# Altium PCB PCB_REV1.PcbDoc (part 2 of 2)
Units mm, origin at the board's own origin, x right, y up, seen from the top; angles counter-clockwise.
Board outline 243.25 x 252.25 mm, 2 copper layers (Top Layer, Bottom Layer); 216 components, 186 nets, 603 pads, 64 vias.
Unrouted connection lines stored in the file: 121.
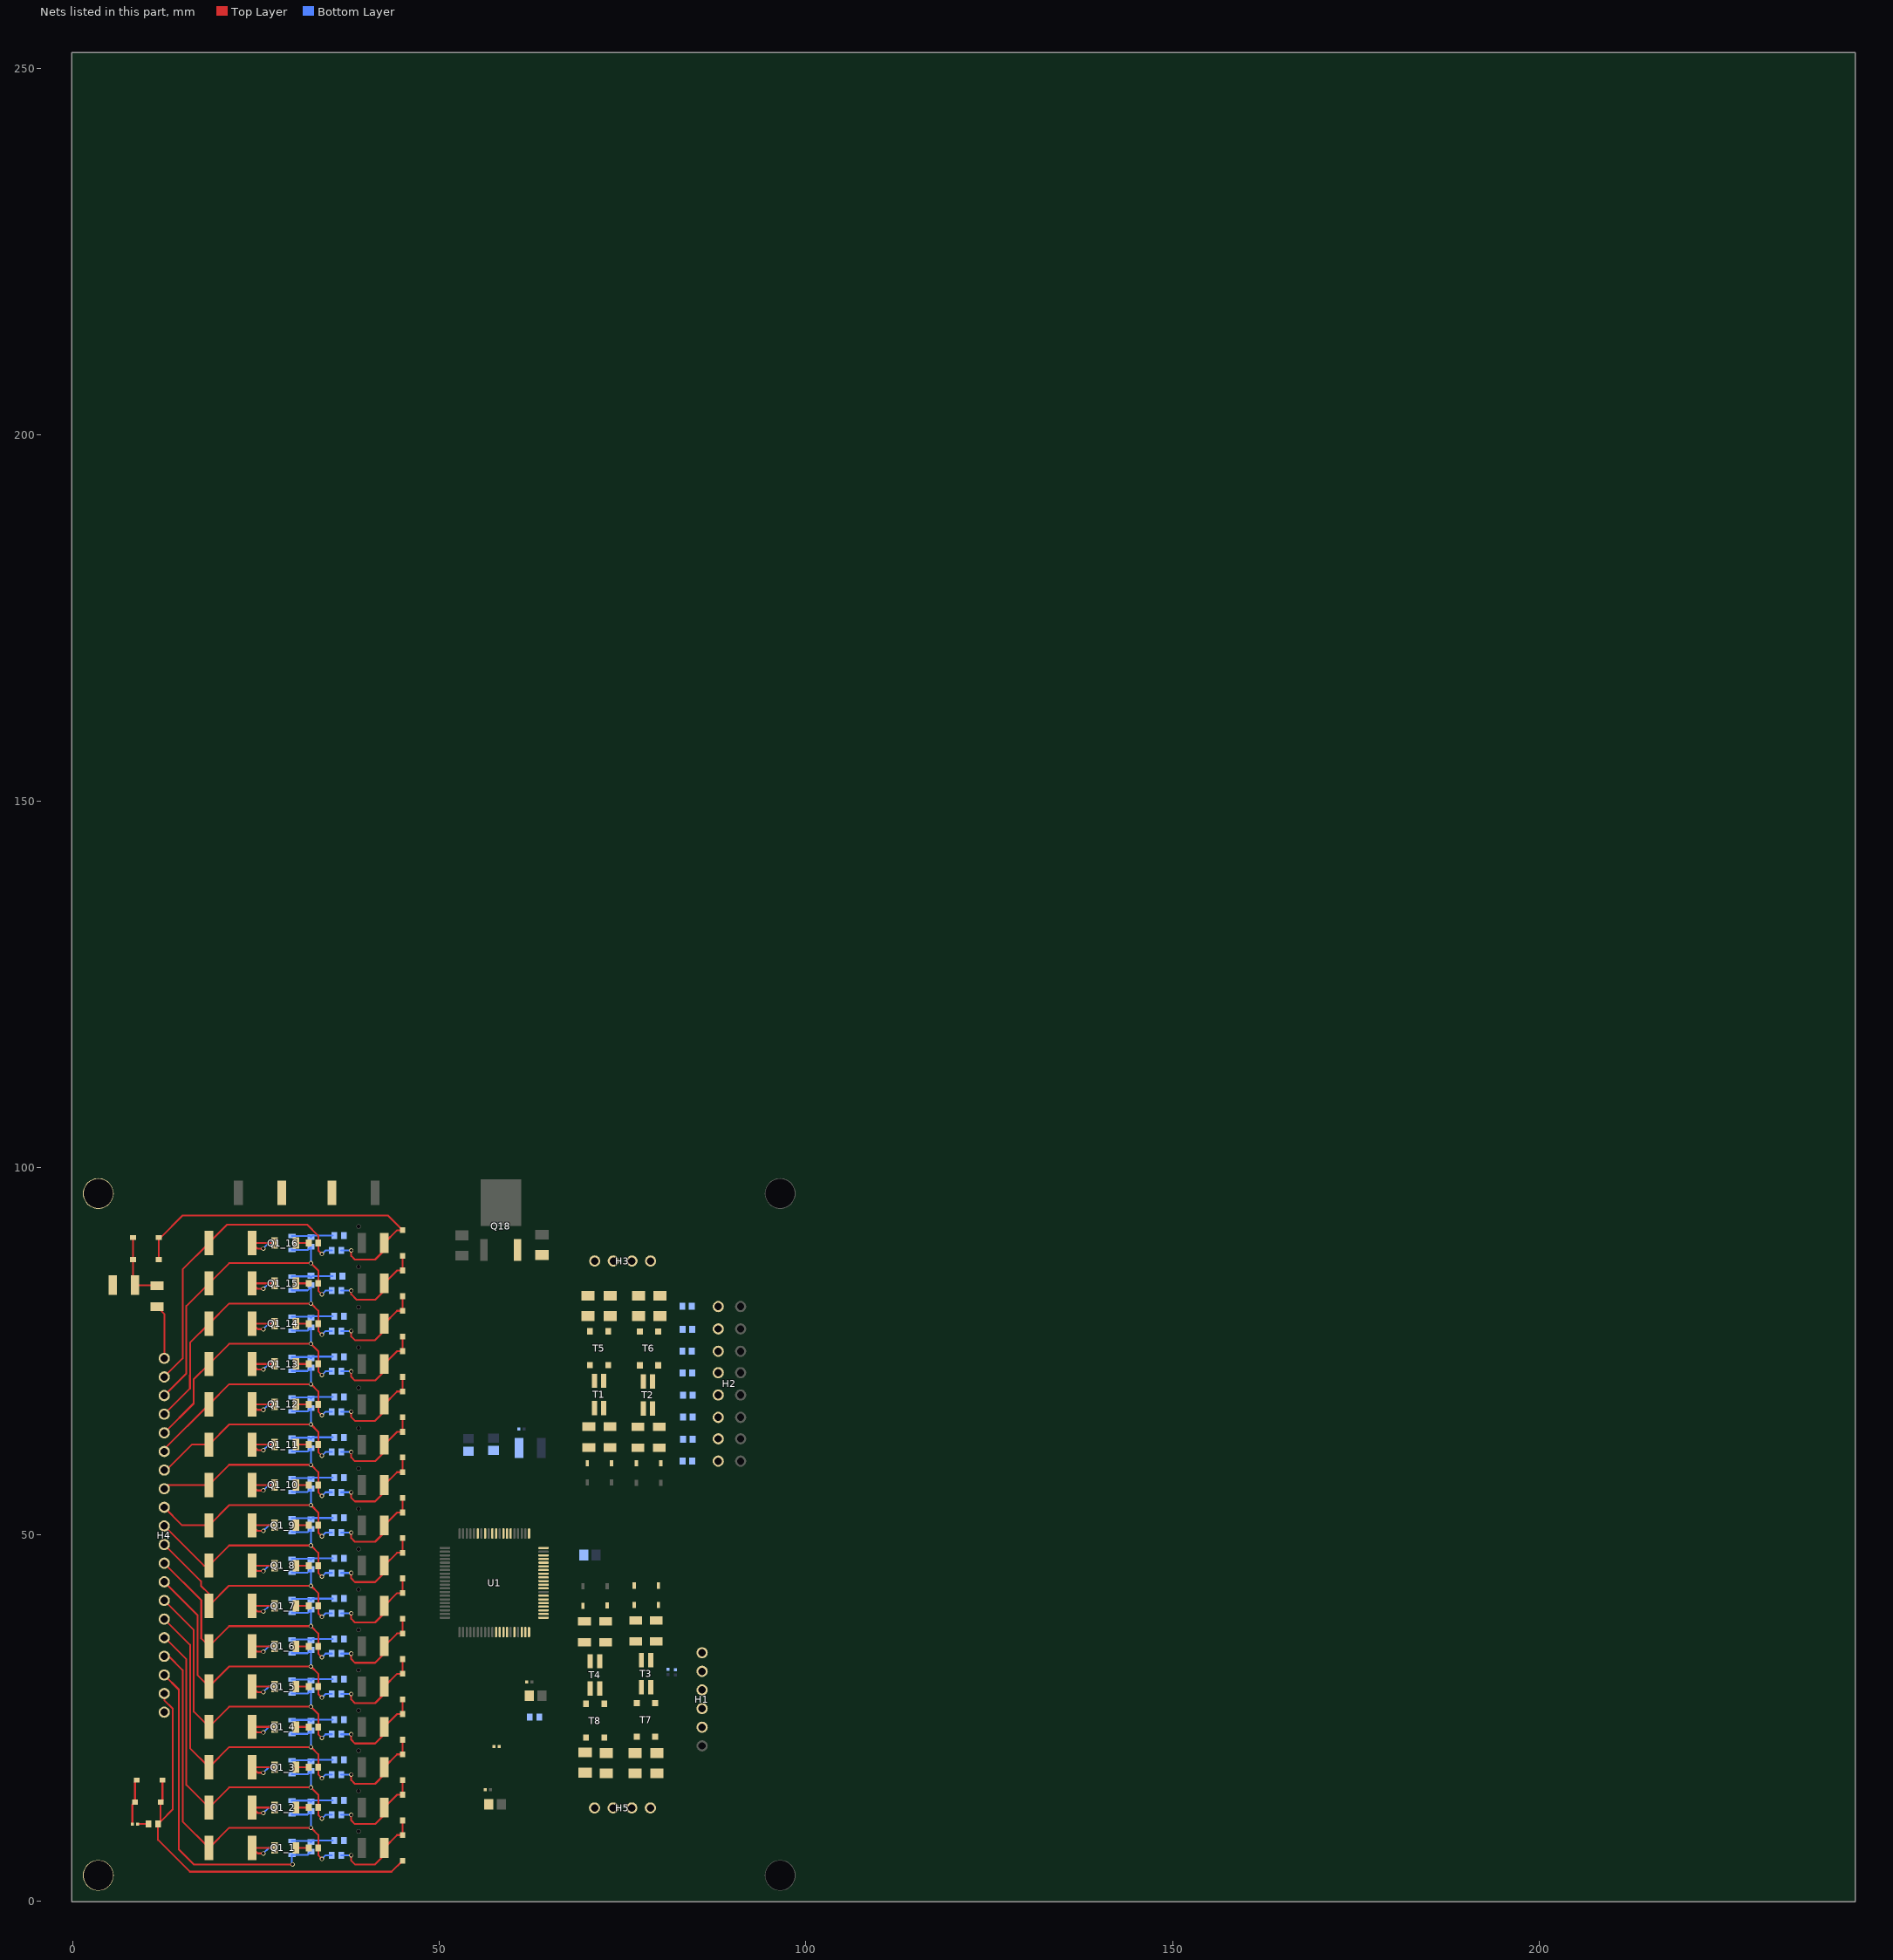
[diagram p2: the nets of this part, all layers, seen from the top]

## Part data (continued)
Q18: "NPN Bipolar Transistor", Case/Package=TO-252, Collector Base Voltage (VCBO)=150V, Continuous Collector Current=1A, Emitter Base Voltage (VEBO)=7V, Manufacturer=Diodes, Manufacturer Part Number=ZXTN4004KTC, Max Operating Temperature=150°C, Max Power Dissipation=3.8W, Min Operating Temperature=-55°C, Package Quantity=2500, Supplier Part Number 1=ZXTN4004KTCDICT-ND, Collector Emitter Breakdown Voltage=150V, Collector Emitter Voltage (VCEO)=150V, Element Configuration=Single, Height=6.2mm, hFE Min=100, LatestRevisionDate=29-May-2009, LatestRevisionNote="IPC-7351 Footprint Added.", Lead Free="Lead Free", Length=6.7mm, Max Breakdown Voltage=150V, Max Collector Current=1A, Mount="Surface Mount", Number of Elements=1, Number of Pins=3, PackageDescription="3-Pin SOT-23 Package 0.95 mm Pitch, 2.4 mm Lead Span", PackageReference=SOT-23B, PackageVersion=Aug-1999, Packaging="Tape and Reel", Polarity=NPN, Power Dissipation=3.8W, Pricing 1="1=0.49, 10=0.42, 100=0.3134, 500=0.2463, 1000=0.1903 (USD)", Published=8-Jun-2000, Publisher="Altium Limited", Radiation Hardening=No, REACH SVHC="No SVHC", Stock 1=0, Supplier 1=Digi-Key, Weight=0.063493oz, Width=2.39mm
R1_1 R1_2 R1_3 R1_4 R1_5 R1_6 R1_7 R1_8 R1_9 R1_10 R1_11 R1_12 R1_13 R1_14 R1_15 R1_16 R2_1 R2_2 R2_3 R2_4 R2_5 R2_6 R2_7 R2_8 R2_9 R2_10 R2_11 R2_12 R2_13 R2_14 R2_15 R2_16 R96: "Resistor", Case/Package=0603, Case Code (Metric)=1608, Manufacturer="Vishay Dale", Manufacturer Part Number=CRCW06031K00FKEA, Max Operating Temperature=155°C, Max Power Dissipation=100mW, Min Operating Temperature=-55°C, Package Quantity=10, Resistance=1kR, Supplier Part Number 1=541-1.00KHCT-ND, Temperature Coefficient=100ppm/°C, Tolerance=1%, Voltage Rating=75V, Case Code (Imperial)=0603, Composition="Thick Film", Contact Plating=Tin, Depth=0.85mm, Features="Automotive AEC-Q200", Height=0.45mm, Lead Free="Lead Free", Length=1.55mm, Military Standard=Not, Mount="Surface Mount", Number of Pins=2, Number of Terminations=2, Packaging="Tape and Reel", Power Rating=100mW, Pricing 1="1=0.1, 10=0.042, 100=0.017, 1000=0.0076, 2500=0.0066 (USD)", Published=8-Jun-2000, Publisher="Altium Limited", Radiation Hardening=No, REACH SVHC=Unknown, Stock 1=0, Supplier 1=Digi-Key, Termination=SMD/SMT, Voltage Rating (DC)=75V, Weight=7.1E-05oz, Width=0.033inch
  R1_1 R1_2 R1_3 R1_4 R1_5 R1_6 R1_7 R1_8 R1_9 R1_10 R1_11 R1_12 R1_13 R1_14 R1_15 R1_16 R2_1 R2_2 R2_3 R2_4 R2_5 R2_6 R2_7 R2_8 R2_9 R2_10 R2_11 R2_12 R2_13 R2_14 R2_15 R2_16: LatestRevisionDate=17-Jul-2002, LatestRevisionNote="Re-released for DXP Platform.", PackageDescription="Axial Device, Thru-Hole; 2 Leads; 0.3 in Pin Spacing", PackageReference=AXIAL-0.3
  R96: LatestRevisionDate=29-May-2009, LatestRevisionNote="IPC-7351 Footprint Added.", PackageDescription="Chip Resistor", PackageReference=J1-0603
R3_1 R3_2 R3_3 R3_4 R3_5 R3_6 R3_7 R3_8 R3_9 R3_10 R3_11 R3_12 R3_13 R3_14 R3_15 R3_16: "Resistor", Case/Package=2512, Case Code (Metric)=6432, Manufacturer="Vishay Dale", Manufacturer Part Number=CRCW251275R0FKEG, Max Operating Temperature=155°C, Max Power Dissipation=1W, Min Operating Temperature=-55°C, Package Quantity=2000, Resistance=75R, Supplier Part Number 1=541-75.0AFCT-ND, Temperature Coefficient=100ppm/°C, Tolerance=1%, Voltage Rating=500V, Case Code (Imperial)=2512, Composition="Thick Film", Contact Plating=Tin, Depth=3.15mm, Features="Automotive AEC-Q200", Height=0.6mm, LatestRevisionDate=17-Jul-2002, LatestRevisionNote="Re-released for DXP Platform.", Lead Free="Lead Free", Length=6.3mm, Military Standard=Not, Mount="Surface Mount", Number of Terminations=2, PackageDescription="Axial Device, Thru-Hole; 2 Leads; 0.3 in Pin Spacing", PackageReference=AXIAL-0.3, Packaging="Tape and Reel", Power Rating=1W, Pricing 1="1=0.39, 10=0.333, 100=0.1301, 1000=0.0545 (USD)", Published=8-Jun-2000, Publisher="Altium Limited", Radiation Hardening=No, REACH SVHC=Unknown, Stock 1=32000, Supplier 1=Digi-Key, Termination=SMD/SMT, Voltage Rating (DC)=500V, Weight=0.001429oz, Width=3.15mm
R4_1 R4_2 R4_3 R4_4 R4_5 R4_6 R4_7 R4_8 R4_9 R4_10 R4_11 R4_12 R4_13 R4_14 R4_15 R4_16: "Resistor", Case/Package=0603, Case Code (Metric)=1608, Manufacturer=Vishay, Manufacturer Part Number=CRCW06032K00FKEA, Max Operating Temperature=155°C, Max Power Dissipation=100mW, Min Operating Temperature=-55°C, Package Quantity=10, Resistance=2kR, Supplier Part Number 1=541-2.00KHCT-ND, Temperature Coefficient=100ppm/°C, Tolerance=1%, Voltage Rating=75V, Case Code (Imperial)=0603, Composition="Thick Film", Contact Plating=Lead,Tin, Depth=0.85mm, Features="Automotive AEC-Q200", Height=0.45mm, LatestRevisionDate=17-Jul-2002, LatestRevisionNote="Re-released for DXP Platform.", Lead Free="Lead Free", Length=1.55mm, Military Standard=Not, Mount="Surface Mount", Number of Pins=2, Number of Terminations=2, PackageDescription="Axial Device, Thru-Hole; 2 Leads; 0.3 in Pin Spacing", PackageReference=AXIAL-0.3, Packaging="Tape and Reel", Power Rating=100mW, Pricing 1="1=0.1, 10=0.042, 100=0.017, 1000=0.0076, 2500=0.0066 (USD)", Published=8-Jun-2000, Publisher="Altium Limited", Radiation Hardening=No, REACH SVHC=Unknown, Stock 1=507412, Supplier 1=Digi-Key, Termination=Solder, Voltage Rating (DC)=75V, Weight=7.1E-05oz, Width=0.85mm
R5_1 R5_2 R5_3 R5_4 R5_5 R5_6 R5_7 R5_8 R5_9 R5_10 R5_11 R5_12 R5_13 R5_14 R5_15 R5_16: "Resistor", Case/Package=0603, Case Code (Metric)=1608, Manufacturer=Yageo, Manufacturer Part Number=RC0603FR-07100KL, Max Operating Temperature=155°C, Min Operating Temperature=-55°C, Power Rating=100mW, Resistance=100kR, Supplier Part Number 1=311-100KHRCT-ND, Temperature Coefficient=100ppm/°C, Tolerance=1%, Voltage Rating=50V, Working Voltage=75V, Case Code (Imperial)=0603, Composition="Thick Film", Depth=0.8mm, Height=0.45mm, LatestRevisionDate=17-Jul-2002, LatestRevisionNote="Re-released for DXP Platform.", Lead Free="Lead Free", Length=1.6mm, Military Standard=Not, Number of Pins=2, Number of Terminations=2, PackageDescription="Axial Device, Thru-Hole; 2 Leads; 0.3 in Pin Spacing", PackageReference=AXIAL-0.3, Packaging="Tape and Reel", Pricing 1="1=0.1, 10=0.032, 100=0.0131, 1000=0.0059, 2500=0.0051 (USD)", Published=8-Jun-2000, Publisher="Altium Limited", REACH SVHC="No SVHC", Stock 1=0, Supplier 1=Digi-Key, Termination=SMD/SMT, Voltage Rating (DC)=50V, Width=0.8mm
R17 R67: "Resistor", Case/Package=2512, Case Code (Metric)=6432, Manufacturer="Vishay Dale", Manufacturer Part Number=CRCW2512200RJNEG, Max Operating Temperature=155°C, Max Power Dissipation=1W, Min Operating Temperature=-55°C, Package Quantity=2000, Resistance=200R, Supplier Part Number 1=541-200XCT-ND, Temperature Coefficient=200ppm/°C, Tolerance=5%, Voltage Rating=500V, Case Code (Imperial)=2512, Composition="Thick Film", Contact Plating=Tin, Depth=3.15mm, Features="Automotive AEC-Q200", Height=0.6mm, LatestRevisionDate=29-May-2009, LatestRevisionNote="IPC-7351 Footprint Added.", Lead Free="Lead Free", Length=6.3mm, Military Standard=Not, Mount="Surface Mount", Number of Pins=2, Number of Terminations=2, PackageDescription="Chip Resistor", PackageReference=J1-0603, Packaging="Tape and Reel", Power Rating=1W, Pricing 1="1=0.39, 10=0.333, 100=0.1301, 1000=0.0545 (USD)", Published=8-Jun-2000, Publisher="Altium Limited", Radiation Hardening=No, REACH SVHC=Unknown, Stock 1=1091, Supplier 1=Digi-Key, Termination=SMD/SMT, Voltage Rating (DC)=500V, Weight=0.001429oz, Width=0.124inch, Working Voltage=500V
R95: "Resistor", Case/Package=1206, Case Code (Metric)=3216, Manufacturer="Vishay Dale", Manufacturer Part Number=CRCW1206100RFKEA, Max Operating Temperature=155°C, Min Operating Temperature=-55°C, Package Quantity=5000, Power Rating=250mW, Resistance=100R, Supplier Part Number 1=541-100FCT-ND, Temperature Coefficient=100ppm/°C, Tolerance=1%, Voltage Rating=200V, Case Code (Imperial)=1206, Composition="Thick Film", Contact Plating=Tin, Depth=1.6mm, Height=0.55mm, LatestRevisionDate=29-May-2009, LatestRevisionNote="IPC-7351 Footprint Added.", Lead Free="Lead Free", Length=3.2mm, Military Standard=Not, Mount="Surface Mount", Number of Pins=2, PackageDescription="Chip Resistor", PackageReference=J1-0603, Packaging="Tape and Reel", Pricing 1="1=0.1, 10=0.075, 100=0.0304, 1000=0.0136, 2500=0.0118 (USD)", Published=8-Jun-2000, Publisher="Altium Limited", Radiation Hardening=No, REACH SVHC=Unknown, Stock 1=0, Supplier 1=Digi-Key, Termination=SMD/SMT, Voltage Rating (DC)=200V, Weight=0.000353oz, Width=1.6mm
R97 R98 R99 R100 R101 R102 R103 R104: "Resistor", Case/Package=1206, Case Code (Metric)=3216, Manufacturer=Vishay, Manufacturer Part Number=CRCW120610R0FKEA, Max Operating Temperature=155°C, Max Power Dissipation=250mW, Min Operating Temperature=-55°C, Package Quantity=10, Resistance=10R, Supplier Part Number 1=541-10.0FCT-ND, Temperature Coefficient=100ppm/°C, Tolerance=1%, Voltage Rating=200V, Case Code (Imperial)=1206, Composition="Thick Film", Contact Plating=Lead,Tin, Depth=1.6mm, Features="Automotive AEC-Q200", Height=0.55mm, LatestRevisionDate=29-May-2009, LatestRevisionNote="IPC-7351 Footprint Added.", Lead Free="Lead Free", Length=3.2mm, Military Standard=Not, Number of Pins=2, Number of Terminations=2, PackageDescription="Chip Resistor", PackageReference=J1-0603, Packaging="Tape and Reel", Power Rating=250mW, Pricing 1="1=0.1, 10=0.075, 100=0.0304, 1000=0.0136, 2500=0.0118 (USD)", Published=8-Jun-2000, Publisher="Altium Limited", Radiation Hardening=No, REACH SVHC=Unknown, Stock 1=0, Supplier 1=Digi-Key, Termination=SMD/SMT, Voltage Rating (DC)=200V, Weight=0.000353oz, Width=0.063inch
R105: "Resistor", Case/Package=0603, Case Code (Metric)=1608, Manufacturer=Yageo, Manufacturer Part Number=RC0603FR-071RL, Max Operating Temperature=155°C, Max Power Dissipation=100mW, Min Operating Temperature=-55°C, Package Quantity=1, Resistance=1R, Supplier Part Number 1=311-1.00HRCT-ND, Temperature Coefficient=200ppm/°C, Tolerance=1%, Voltage Rating=50V, Case Code (Imperial)=0603, Composition="Thick Film", Depth=0.8mm, Features="Moisture Resistant", Height=0.022inch, LatestRevisionDate=29-May-2009, LatestRevisionNote="IPC-7351 Footprint Added.", Lead Free="Lead Free", Length=0.063inch, Number of Pins=2, Number of Terminations=2, PackageDescription="Chip Resistor", PackageReference=J1-0603, Packaging="Tape and Reel", Power Rating=100mW, Pricing 1="1=0.1, 10=0.053, 100=0.0214, 1000=0.0096, 2500=0.0083 (USD)", Published=8-Jun-2000, Publisher="Altium Limited", REACH SVHC=Unknown, Stock 1=0, Supplier 1=Digi-Key, Termination=SMD/SMT, Voltage Rating (DC)=50V, Width=0.031inch
R106 R107 R108 R109 R110 R111 R112 R113: "Resistor", Case/Package=0603, Case Code (Metric)=1608, Manufacturer=Vishay, Manufacturer Part Number=CRCW060310K0FKEA, Max Operating Temperature=155°C, Max Power Dissipation=100mW, Min Operating Temperature=-55°C, Package Quantity=10, Resistance=10kR, Supplier Part Number 1=541-10.0KHCT-ND, Temperature Coefficient=100ppm/°C, Tolerance=1%, Voltage Rating=75V, Case Code (Imperial)=0603, Composition="Thick Film", Contact Plating=Lead,Tin, Depth=0.85mm, Features="Automotive AEC-Q200", Height=0.45mm, LatestRevisionDate=29-May-2009, LatestRevisionNote="IPC-7351 Footprint Added.", Lead Free="Lead Free", Length=1.55mm, Military Standard=Not, Number of Pins=2, Number of Terminations=2, PackageDescription="Chip Resistor", PackageReference=J1-0603, Packaging="Tape and Reel", Power Rating=100mW, Pricing 1="1=0.1, 10=0.042, 100=0.017, 1000=0.0076, 2500=0.0066 (USD)", Published=8-Jun-2000, Publisher="Altium Limited", Radiation Hardening=No, REACH SVHC=Unknown, Stock 1=0, Supplier 1=Digi-Key, Termination=SMD/SMT, Voltage Rating (DC)=75V, Weight=7.1E-05oz, Width=0.033inch
U1: Case/Package=TQFP, Manufacturer="Texas Instruments", Manufacturer Part Number=BQ76PL455ATPFCRQ1, Max Operating Temperature=105°C, Min Operating Temperature=-40°C, Operating Supply Voltage=22V, Supplier Part Number 1=296-44049-1-ND, Fault Protection="Over/Under Voltage", Interface=UART, Lead Free="Lead Free", Mount="Surface Mount", Number of Pins=80, Packaging="Tape and Reel", Pricing 1="1=19.03, 10=17.486, 100=14.7676, 500=13.1368 (USD)", Stock 1=0, Supplier 1=Digi-Key

## Free pads (board coordinates)
  round 4.2 hole 4: 1(3.5,3.5) 2(3.5,96.5) 3(96.5,96.5) 4(96.5,3.5)
  round 0.6 hole 0.5: 1(39,92) 4(39,86.5) 9(39,81) 10(39,75.5) 11(39,70) 12(39,64.5) 13(39,59) 14(39,53.5) 15(39,48) 16(39,42.5) 17(39,37) 18(39,31.5) 19(39,26) 20(39,20.5) 21(39,15) 22(39,9.5)

## Via types
v1: diameter 0.6, hole 0.4, Top Layer to Bottom Layer, 64 vias

## Nets (pads, with @x,y where several pads share a name; then routed paths per layer and width w, separated by ;. In a path a pad name is that pad's centre, name@x,y a point inside that pad or via, vN(x,y) a via of type N, cw(c..) or ccw(c..) an arc to the next point about the centre after c; other vN are vias at no path point)
3.3V: R106.1 R107.1 R108.1 R109.1 R110.1 R111.1 R112.1 R113.1
AUX0: U1.66
AUX1: H2.7 R107.2
AUX2: H2.6 R108.2
AUX3: H2.5 R109.2
AUX4: H2.4 R110.2
AUX5: U1.61
AUX6: U1.60
AUX7: H2.1 R113.2
CELL0: H4.3 Q1_1.2 R5_1.1 | length 45.1
  Top Layer w0.254: H4.3@12.5,30.84 14.492,28.848 14.492,10.64 14.5,10.632 14.5,7 16.5,5 v1(30,5)
  Bottom Layer w0.254: v1(30,5) 29.9,5.1 Q1_1.2@29.9,6.3 32.05,6.3 R5_1.1@32.5,6.75
CELL1: H4.4 Q1_2.2 R1_1.2 R2_1.2 R3_1.1 R5_2.1 | length 55.5
  Top Layer w0.254: H4.4@12.5,33.38 13.12,33.38 15,31.5 15,10.85 R3_1.1@18.6,7.25 21.35,10 v1(32.5,10) 33.5,9 R2_1.2@33.5,7.25 33.5,6.25 v1(34,5.75)
  Bottom Layer w0.254: Q1_2.2@29.9,11.8 32.05,11.8 R5_2.1@32.5,12.25 v1(32.5,10) ; v1(34,5.75) 34.5,6.25 R1_1.2@35.35,6.25
CELL2: H4.5 Q1_3.2 R1_2.2 R2_2.2 R3_2.1 R5_3.1 | length 52.2
  Top Layer w0.254: H4.5@12.54,35.96 15.508,32.992 15.508,15.842 R3_2.1@18.6,12.75 21.35,15.5 v1(32.5,15.5) 33.5,14.5 R2_2.2@33.5,12.75 33.5,11.75 v1(34,11.25)
  Bottom Layer w0.254: Q1_3.2@29.9,17.3 32.05,17.3 R5_3.1@32.5,17.75 v1(32.5,15.5) ; v1(34,11.25) 34.5,11.75 R1_2.2@35.35,11.75
CELL3: H4.6 Q1_4.2 R1_3.2 R2_3.2 R3_3.1 R5_4.1 | length 49.2
  Top Layer w0.254: H4.6@12.5,38.46 16.016,34.944 16.016,20.834 R3_3.1@18.6,18.25 21.35,21 v1(32.5,21) 33.5,20 R2_3.2@33.5,18.25 33.5,17.25 v1(34,16.75)
  Bottom Layer w0.254: Q1_4.2@29.9,22.8 32.05,22.8 R5_4.1@32.5,23.25 v1(32.5,21) ; v1(34,16.75) 34.5,17.25 R1_3.2@35.35,17.25
CELL4: H4.7 Q1_5.2 R1_4.2 R2_4.2 R3_4.1 R5_5.1 | length 46.3
  Top Layer w0.254: H4.7@12.5,41 16.524,36.976 16.524,25.826 R3_4.1@18.6,23.75 21.35,26.5 v1(32.5,26.5) 33.5,25.5 R2_4.2@33.5,23.75 33.5,22.75 v1(34,22.25)
  Bottom Layer w0.254: Q1_5.2@29.9,28.3 32.05,28.3 R5_5.1@32.5,28.75 v1(32.5,26.5) ; v1(34,22.25) 34.5,22.75 R1_4.2@35.35,22.75
CELL5: H4.8 Q1_6.2 R1_5.2 R2_5.2 R3_5.1 R5_6.1 | length 43.3
  Top Layer w0.254: H4.8@12.5,43.54 17.032,39.008 17.032,30.818 R3_5.1@18.6,29.25 21.35,32 v1(32.5,32) 33.5,31 R2_5.2@33.5,29.25 33.5,28.25 v1(34,27.75)
  Bottom Layer w0.254: Q1_6.2@29.9,33.8 32.05,33.8 R5_6.1@32.5,34.25 v1(32.5,32) ; v1(34,27.75) 34.5,28.25 R1_5.2@35.35,28.25
CELL6: H4.9 Q1_7.2 R1_6.2 R2_6.2 R3_6.1 R5_7.1 | length 40.4
  Top Layer w0.254: H4.9@12.5,46.08 17.54,41.04 17.54,35.81 R3_6.1@18.6,34.75 21.35,37.5 v1(32.5,37.5) 33.5,36.5 R2_6.2@33.5,34.75 33.5,33.75 v1(34,33.25)
  Bottom Layer w0.254: Q1_7.2@29.9,39.3 32.05,39.3 R5_7.1@32.5,39.75 v1(32.5,37.5) ; v1(34,33.25) 34.5,33.75 R1_6.2@35.35,33.75
CELL7: H4.10 Q1_8.2 R1_7.2 R2_7.2 R3_7.1 R5_8.1 | length 37.5
  Top Layer w0.254: H4.10@12.5,48.62 17.5,43.62 17.5,43 18.6,41.9 R3_7.1@18.6,40.3 ; R3_7.1@18.55,40.25 R3_7.1@18.6,40.3 ; R3_7.1@18.6,40.25 R3_7.1@18.6,40.3 ; v1(34,38.75) 33.5,39.25 R2_7.2@33.5,40.25 33.5,42 v1(32.5,43) 21.3,43 R3_7.1@18.6,40.3
  Bottom Layer w0.254: Q1_8.2@29.9,44.8 32.05,44.8 R5_8.1@32.5,45.25 v1(32.5,43) ; v1(34,38.75) 34.5,39.25 R1_7.2@35.35,39.25
CELL8: H4.11 Q1_9.2 R1_8.2 R2_8.2 R3_8.1 R5_9.1 | length 34.8
  Top Layer w0.254: H4.11@12.5,51.16 17.91,45.75 R3_8.1@18.6,45.75 21.35,48.5 v1(32.5,48.5) 33.5,47.5 R2_8.2@33.5,45.75 33.5,44.75 v1(34,44.25)
  Bottom Layer w0.254: Q1_9.2@29.9,50.3 32.05,50.3 R5_9.1@32.5,50.75 v1(32.5,48.5) ; v1(34,44.25) 34.5,44.75 R1_8.2@35.35,44.75
CELL9: H4.12 Q1_10.2 R1_9.2 R2_9.2 R3_9.1 R5_10.1 | length 33.6
  Top Layer w0.254: H4.12@12.5,53.7 14.95,51.25 R3_9.1@18.6,51.25 21.35,54 v1(32.5,54) 33.5,53 R2_9.2@33.5,51.25 33.5,50.25 v1(34,49.75)
  Bottom Layer w0.254: Q1_10.2@29.9,55.8 32.05,55.8 R5_10.1@32.5,56.25 v1(32.5,54) ; v1(34,49.75) 34.5,50.25 R1_9.2@35.35,50.25
CELL10: H4.13 Q1_11.2 R1_10.2 R2_10.2 R3_10.1 R5_11.1 | length 32.8
  Top Layer w0.254: H4.13@12.5,56.24 13.01,56.75 R3_10.1@18.6,56.75 21.35,59.5 v1(32.5,59.5) 33.5,58.5 R2_10.2@33.5,56.75 33.5,55.75 v1(34,55.25)
  Bottom Layer w0.254: Q1_11.2@29.9,61.3 32.05,61.3 R5_11.1@32.5,61.75 v1(32.5,59.5) ; v1(34,55.25) 34.5,55.75 R1_10.2@35.35,55.75
CELL11: H4.14 Q1_12.2 R1_11.2 R2_11.2 R3_11.1 R5_12.1 | length 34
  Top Layer w0.254: H4.14@12.5,58.78 12.78,58.78 16.25,62.25 R3_11.1@18.6,62.25 21.35,65 v1(32.5,65) 33.5,64 R2_11.2@33.5,62.25 33.5,61.25 v1(34,60.75)
  Bottom Layer w0.254: Q1_12.2@29.9,66.8 32.05,66.8 R5_12.1@32.5,67.25 v1(32.5,65) ; v1(34,60.75) 34.5,61.25 R1_11.2@35.35,61.25
CELL12: H4.15 Q1_13.2 R1_12.2 R2_12.2 R3_12.1 R5_13.1 | length 35.9
  Top Layer w0.254: H4.15@12.5,61.32 12.82,61.32 12.5,61.64 12.5,61.642 18.6,67.742 R3_12.1@18.6,67.75 21.35,70.5 v1(32.5,70.5) 33.5,69.5 R2_12.2@33.5,67.75 33.5,66.75 v1(34,66.25)
  Bottom Layer w0.254: Q1_13.2@29.9,72.3 32.05,72.3 R5_13.1@32.5,72.75 v1(32.5,70.5) ; v1(34,66.25) 34.5,66.75 R1_12.2@35.35,66.75
CELL13: H4.16 Q1_14.2 R1_13.2 R2_13.2 R3_13.1 R5_14.1 | length 38.4
  Top Layer w0.254: H4.16@12.5,63.86 16.5,67.86 16.5,69.682 16.508,69.69 16.508,71.158 R3_13.1@18.6,73.25 21.35,76 v1(32.5,76) 33.5,75 R2_13.2@33.5,73.25 33.5,72.25 v1(34,71.75)
  Bottom Layer w0.254: Q1_14.2@29.9,77.8 32.05,77.8 R5_14.1@32.5,78.25 v1(32.5,76) ; v1(34,71.75) 34.5,72.25 R1_13.2@35.35,72.25
CELL14: H4.17 Q1_15.2 R1_14.2 R2_14.2 R3_14.1 R5_15.1 | length 41.6
  Top Layer w0.254: H4.17@12.5,66.4 16,69.9 16,71.722 16.016,71.738 16.016,76.166 R3_14.1@18.6,78.75 21.35,81.5 v1(32.5,81.5) 33.5,80.5 R2_14.2@33.5,78.75 33.5,77.75 v1(34,77.25)
  Bottom Layer w0.254: Q1_15.2@29.9,83.3 32.05,83.3 R5_15.1@32.5,83.75 ; v1(32.5,81.5) R5_15.1@32.5,83.75 ; R5_15.1@32.5,84 R5_15.1@32.5,83.75 ; v1(34,77.25) 34.5,77.75 R1_14.2@35.35,77.75
CELL15: H4.18 Q1_16.2 R1_15.2 R2_15.2 R3_15.1 R5_16.1 | length 44.3
  Top Layer w0.254: H4.18@12.5,68.94 15.5,71.94 15.5,73.782 15.508,73.79 15.508,81.158 R3_15.1@18.6,84.25 21.35,87 v1(32.5,87) 33.5,86 R2_15.2@33.5,84.25 33.5,83.25 v1(34,82.75)
  Bottom Layer w0.254: Q1_16.2@29.9,88.8 32.05,88.8 R5_16.1@32.5,89.25 v1(32.5,87) ; v1(34,82.75) 34.5,83.25 R1_15.2@35.35,83.25
CELL16: H4.19 R1_16.2 R2_16.2 R3_16.1 | length 41.8
  Top Layer w0.254: H4.19@12.74,71.24 12.74,71.74 15,74 15,86.15 R3_16.1@18.6,89.75 ; R3_16.1@18.55,89.75 21.05,92.25 32,92.25 33.5,90.75 R2_16.2@33.5,89.75 33.5,88.75 v1(34,88.25)
  Bottom Layer w0.254: v1(34,88.25) 34.5,88.75 R1_16.2@35.35,88.75
CHM: C48.2 U1.33
COMMH+: U1.55
COMMH-: U1.54
COMML+: U1.52
COMML-: U1.53
EQ1: R4_1.1
EQ2: R4_2.1
EQ3: R4_3.1
EQ4: R4_4.1
EQ5: R4_5.1
EQ6: R4_6.1
EQ7: R4_7.1
EQ8: R4_8.1
EQ9: R4_9.1
EQ10: R4_10.1
EQ11: R4_11.1
EQ12: R4_12.1
EQ13: R4_13.1
EQ14: R4_14.1
EQ15: R4_15.1
EQ16: R4_16.1
FAULT_N: H1.4 U1.40
FAULTH+: U1.57
FAULTH-: U1.56
FAULTL+: U1.50
FAULTL-: U1.51
GND: C1_1.1 C1_2.1 C1_3.1 C1_4.1 C1_5.1 C1_6.1 C1_7.1 C1_8.1 C1_9.1 C1_10.1 C1_11.1 C1_12.1 C1_13.1 C1_14.1 C1_15.1 C1_16.1 C61.2 C62.1 C63.1 C64.1 D33.1 D34.1 D35.1 D36.1 D39.1 D40.1 H1.1 H2.9 H2.10 H2.11 H2.12 H2.13 H2.14 H2.15 H2.16 pad.1@39,92 pad.3 pad.4 pad.9 pad.10 pad.11 pad.12 pad.13 pad.14 pad.15 pad.16 pad.17 pad.18 pad.19 pad.20 pad.21 pad.22 | length 39
  Top Layer w0.254: pad.22@39,9.5 39.45,9.05 C1_1.1@39.45,7.25 ; pad.21@39,15 39.45,14.55 C1_2.1@39.45,12.75 ; pad.20@39,20.5 39.45,20.05 C1_3.1@39.45,18.25 ; pad.19@39,26 39.45,25.55 C1_4.1@39.45,23.75 ; pad.18@39,31.5 39.45,31.05 C1_5.1@39.45,29.25 ; pad.17@39,37 39.45,36.55 C1_6.1@39.45,34.75 ; pad.16@39,42.5 39.45,42.05 C1_7.1@39.45,40.25 ; pad.15@39,48 39.45,47.55 C1_8.1@39.45,45.75 ; pad.14@39,53.5 39.45,53.05 C1_9.1@39.45,51.25 ; pad.13@39,59 39.45,58.55 C1_10.1@39.45,56.75 ; pad.12@39,64.5 39.45,64.05 C1_11.1@39.45,62.25 ; pad.11@39,70 39.45,69.55 C1_12.1@39.45,67.75 ; pad.10@39,75.5 39.45,75.05 C1_13.1@39.45,73.25 ; pad.9@39,81 39.45,80.55 C1_14.1@39.45,78.75 ; pad.4@39,86.5 39.45,86.05 C1_15.1@39.45,84.25 ; pad.1@39,92 39.45,91.55 C1_16.1@39.45,89.75
GND: C51.1 C52.1 D19.1 D20.2 H4.1 pad.1@3.5,3.5 pad.2 | length 6.2
  Top Layer w0.254: C52.1@8.15,10.5 8.15,13.15 D19.1@8.5,13.5 8.5,16.25 D20.2@8.75,16.5
H3COMMH+: C55.2 H3.2
H3COMMH-: C56.2 H3.1
H3FAULTH+: C53.2 H3.4
H3FAULTH-: C54.2 H3.3
H5COMML+: C58.2 H5.3
H5COMML-: C57.2 H5.4
H5FAULTL+: C60.2 H5.1
H5FAULTL-: C59.2 H5.2
NetC45_1: C45.1 U1.58
NetC48_1: C48.1 U1.32
NetC53_1: C53.1 T5.4
NetC54_1: C54.1 T5.3
NetC55_1: C55.1 T6.4
NetC56_1: C56.1 T6.3
NetC57_1: C57.1 T7.4
NetC58_1: C58.1 T7.3
NetC59_1: C59.1 T8.4
NetC60_1: C60.1 T8.3
NetD2_1_1: D2_1.1 R2_1.1 | length 1.7
  Top Layer w0.254: D2_1.1@30.5,7.25 R2_1.1@32.2,7.25
NetD2_1_2: D2_1.2 Q1_1.3 R3_1.2 | length 6.7
  Top Layer w0.254: v1(26,6.5) 25.25,6.5 R3_1.2@24.5,7.25 D2_1.2@27.55,7.25 D2_1.2@27.6,7.25
  Bottom Layer w0.254: v1(26,6.5) 26.75,7.25 Q1_1.3@27.5,7.25
NetD2_2_1: D2_2.1 R2_2.1 | length 1.7
  Top Layer w0.254: D2_2.1@30.5,12.75 R2_2.1@32.2,12.75
NetD2_2_2: D2_2.2 Q1_2.3 R3_2.2 | length 6.7
  Top Layer w0.254: v1(26,12) 25.25,12 R3_2.2@24.5,12.75 D2_2.2@27.55,12.75 D2_2.2@27.6,12.75
  Bottom Layer w0.254: v1(26,12) 26.75,12.75 Q1_2.3@27.5,12.75
NetD2_3_1: D2_3.1 R2_3.1 | length 1.8
  Top Layer w0.254: D2_3.1@30.45,18.25 R2_3.1@32.2,18.25
NetD2_3_2: D2_3.2 Q1_3.3 R3_3.2 | length 6.7
  Top Layer w0.254: v1(26,17.5) 25.25,17.5 R3_3.2@24.5,18.25 D2_3.2@27.55,18.25 D2_3.2@27.6,18.25
  Bottom Layer w0.254: v1(26,17.5) 26.75,18.25 Q1_3.3@27.5,18.25
NetD2_4_1: D2_4.1 R2_4.1 | length 1.8
  Top Layer w0.254: D2_4.1@30.45,23.75 R2_4.1@32.2,23.75
NetD2_4_2: D2_4.2 Q1_4.3 R3_4.2 | length 6.8
  Top Layer w0.254: v1(26,23) 25.2,23 24.45,23.75 R3_4.2@24.5,23.75 D2_4.2@27.55,23.75 D2_4.2@27.6,23.75
  Bottom Layer w0.254: v1(26,23) 26.75,23.75 Q1_4.3@27.5,23.75
NetD2_5_1: D2_5.1 R2_5.1 | length 1.8
  Top Layer w0.254: D2_5.1@30.5,29.25 R2_5.1@32.35,29.25
NetD2_5_2: D2_5.2 Q1_5.3 R3_5.2 | length 6.6
  Top Layer w0.254: R3_5.2@24.45,28.742 24.958,28.742 25.2,28.5 v1(26,28.5) ; R3_5.2@24.45,29.25 R3_5.2@24.5,29.25 D2_5.2@27.55,29.25 D2_5.2@27.6,29.25
  Bottom Layer w0.254: v1(26,28.5) 26.75,29.25 Q1_5.3@27.5,29.25
NetD2_6_1: D2_6.1 R2_6.1 | length 1.8
  Top Layer w0.254: D2_6.1@30.45,34.75 R2_6.1@32.2,34.75
NetD2_6_2: D2_6.2 Q1_6.3 R3_6.2 | length 6.8
  Top Layer w0.254: v1(26,34) 25.2,34 24.45,34.75 R3_6.2@24.5,34.75 D2_6.2@27.55,34.75 D2_6.2@27.6,34.75
  Bottom Layer w0.254: v1(26,34) 26.75,34.75 Q1_6.3@27.5,34.75
NetD2_7_1: D2_7.1 R2_7.1 | length 1.7
  Top Layer w0.254: D2_7.1@30.5,40.25 R2_7.1@32.2,40.25
NetD2_7_2: D2_7.2 Q1_7.3 R3_7.2 | length 6.8
  Top Layer w0.254: v1(26,39.5) 25.2,39.5 24.45,40.25 R3_7.2@24.5,40.25 D2_7.2@27.55,40.25 D2_7.2@27.6,40.25
  Bottom Layer w0.254: v1(26,39.5) 26.75,40.25 Q1_7.3@27.5,40.25
NetD2_8_1: D2_8.1 R2_8.1 | length 1.7
  Top Layer w0.254: D2_8.1@30.5,45.75 R2_8.1@32.2,45.75
NetD2_8_2: D2_8.2 Q1_8.3 R3_8.2 | length 6.8
  Top Layer w0.254: v1(26,45) 25.2,45 24.45,45.75 R3_8.2@24.5,45.75 D2_8.2@27.55,45.75 D2_8.2@27.6,45.75
  Bottom Layer w0.254: v1(26,45) 26.75,45.75 Q1_8.3@27.5,45.75
NetD2_9_1: D2_9.1 R2_9.1 | length 1.7
  Top Layer w0.254: D2_9.1@30.5,51.25 R2_9.1@32.2,51.25
NetD2_9_2: D2_9.2 Q1_9.3 R3_9.2 | length 6.8
  Top Layer w0.254: v1(26,50.5) 25.2,50.5 24.45,51.25 R3_9.2@24.5,51.25 D2_9.2@27.55,51.25 D2_9.2@27.6,51.25
  Bottom Layer w0.254: v1(26,50.5) 26.75,51.25 Q1_9.3@27.5,51.25
NetD2_10_1: D2_10.1 R2_10.1 | length 1.7
  Top Layer w0.254: D2_10.1@30.5,56.75 R2_10.1@32.2,56.75
NetD2_10_2: D2_10.2 Q1_10.3 R3_10.2 | length 6.8
  Top Layer w0.254: v1(26,56) 25.2,56 24.45,56.75 R3_10.2@24.5,56.75 D2_10.2@27.55,56.75 D2_10.2@27.6,56.75
  Bottom Layer w0.254: v1(26,56) 26.75,56.75 Q1_10.3@27.5,56.75
NetD2_11_1: D2_11.1 R2_11.1 | length 1.7
  Top Layer w0.254: D2_11.1@30.5,62.25 R2_11.1@32.2,62.25
NetD2_11_2: D2_11.2 Q1_11.3 R3_11.2 | length 6.7
  Top Layer w0.254: v1(26,61.5) 25.25,61.5 R3_11.2@24.5,62.25 D2_11.2@27.55,62.25 D2_11.2@27.6,62.25
  Bottom Layer w0.254: v1(26,61.5) 26.75,62.25 Q1_11.3@27.5,62.25
NetD2_12_1: D2_12.1 R2_12.1 | length 1.8
  Top Layer w0.254: D2_12.1@30.45,67.75 R2_12.1@32.2,67.75
NetD2_12_2: D2_12.2 Q1_12.3 R3_12.2 | length 6.8
  Top Layer w0.254: v1(26,67) 25.2,67 24.45,67.75 R3_12.2@24.5,67.75 D2_12.2@27.55,67.75 D2_12.2@27.6,67.75
  Bottom Layer w0.254: v1(26,67) 26.75,67.75 Q1_12.3@27.5,67.75
NetD2_13_1: D2_13.1 R2_13.1 | length 1.8
  Top Layer w0.254: D2_13.1@30.45,73.25 R2_13.1@32.2,73.25
NetD2_13_2: D2_13.2 Q1_13.3 R3_13.2 | length 6.8
  Top Layer w0.254: v1(26,72.5) 25.2,72.5 24.45,73.25 R3_13.2@24.5,73.25 D2_13.2@27.55,73.25 D2_13.2@27.6,73.25
  Bottom Layer w0.254: v1(26,72.5) 26.75,73.25 Q1_13.3@27.5,73.25
NetD2_14_1: D2_14.1 R2_14.1 | length 1.8
  Top Layer w0.254: D2_14.1@30.45,78.75 R2_14.1@32.2,78.75
NetD2_14_2: D2_14.2 Q1_14.3 R3_14.2 | length 6.7
  Top Layer w0.254: v1(26,78) 25.25,78 R3_14.2@24.5,78.75 D2_14.2@27.55,78.75 D2_14.2@27.6,78.75
  Bottom Layer w0.254: v1(26,78) 26.75,78.75 Q1_14.3@27.5,78.75
NetD2_15_1: D2_15.1 R2_15.1 | length 1.7
  Top Layer w0.254: D2_15.1@30.5,84.25 R2_15.1@32.2,84.25
NetD2_15_2: D2_15.2 Q1_15.3 R3_15.2 | length 6.8
  Top Layer w0.254: v1(26,83.5) 25.2,83.5 24.45,84.25 R3_15.2@24.5,84.25 D2_15.2@27.55,84.25 D2_15.2@27.6,84.25
  Bottom Layer w0.254: v1(26,83.5) 26.75,84.25 Q1_15.3@27.5,84.25
NetD2_16_1: D2_16.1 R2_16.1 | length 1.7
  Top Layer w0.254: D2_16.1@30.5,89.75 R2_16.1@32.2,89.75
NetD2_16_2: D2_16.2 Q1_16.3 R3_16.2 | length 6.8
  Top Layer w0.254: v1(26,89) 25.2,89 24.45,89.75 R3_16.2@24.5,89.75 D2_16.2@27.55,89.75 D2_16.2@27.6,89.75
  Bottom Layer w0.254: v1(26,89) 26.75,89.75 Q1_16.3@27.5,89.75
NetD33_2: D33.2 R97.1
NetD34_2: D34.2 R98.1
NetD35_2: D35.2 R99.1
NetD36_2: D36.2 R100.1
NetD37_1: D37.1 D38.1
NetD37_2: D37.2 R101.1
NetD38_2: D38.2 R102.1
NetD39_2: D39.2 R103.1
NetD40_2: D40.2 R104.1
NetH2_2: H2.2 R112.2
NetH2_3: H2.3 R111.2
NetH2_8: H2.8 R106.2
NetQ1_1_1: Q1_1.1 R4_1.2 R5_1.2 | length 5.7
  Bottom Layer w0.254: Q1_1.1@29.9,8.2 32.35,8.2 R5_1.2@32.5,8.05 32.7,8.25 R4_1.2@35.5,8.25
NetQ1_2_1: Q1_2.1 R4_2.2 R5_2.2 | length 5.7
  Bottom Layer w0.254: Q1_2.1@29.9,13.7 32.35,13.7 R5_2.2@32.5,13.55 32.7,13.75 R4_2.2@35.5,13.75
NetQ1_3_1: Q1_3.1 R4_3.2 R5_3.2 | length 5.7
  Bottom Layer w0.254: Q1_3.1@29.9,19.2 32.35,19.2 R5_3.2@32.5,19.05 32.7,19.25 R4_3.2@35.5,19.25
NetQ1_4_1: Q1_4.1 R4_4.2 R5_4.2 | length 5.7
  Bottom Layer w0.254: Q1_4.1@29.9,24.7 32.35,24.7 R5_4.2@32.5,24.55 32.7,24.75 R4_4.2@35.5,24.75
NetQ1_5_1: Q1_5.1 R4_5.2 R5_5.2 | length 5.7
  Bottom Layer w0.254: Q1_5.1@29.9,30.2 32.35,30.2 R5_5.2@32.5,30.05 32.7,30.25 R4_5.2@35.5,30.25
NetQ1_6_1: Q1_6.1 R4_6.2 R5_6.2 | length 5.7
  Bottom Layer w0.254: Q1_6.1@29.9,35.7 32.35,35.7 R5_6.2@32.5,35.55 32.7,35.75 R4_6.2@35.5,35.75
NetQ1_7_1: Q1_7.1 R4_7.2 R5_7.2 | length 5.7
  Bottom Layer w0.254: Q1_7.1@29.9,41.2 32.35,41.2 R5_7.2@32.5,41.05 32.7,41.25 R4_7.2@35.5,41.25
NetQ1_8_1: Q1_8.1 R4_8.2 R5_8.2 | length 5.7
  Bottom Layer w0.254: Q1_8.1@29.9,46.7 32.35,46.7 R5_8.2@32.5,46.55 32.7,46.75 R4_8.2@35.5,46.75
NetQ1_9_1: Q1_9.1 R4_9.2 R5_9.2 | length 5.7
  Bottom Layer w0.254: Q1_9.1@29.9,52.2 32.35,52.2 R5_9.2@32.5,52.05 32.7,52.25 R4_9.2@35.5,52.25
NetQ1_10_1: Q1_10.1 R4_10.2 R5_10.2 | length 5.7
  Bottom Layer w0.254: Q1_10.1@29.9,57.7 32.35,57.7 R5_10.2@32.5,57.55 32.7,57.75 R4_10.2@35.5,57.75
NetQ1_11_1: Q1_11.1 R4_11.2 R5_11.2 | length 5.7
  Bottom Layer w0.254: Q1_11.1@29.9,63.2 32.35,63.2 R5_11.2@32.5,63.05 32.7,63.25 R4_11.2@35.5,63.25
NetQ1_12_1: Q1_12.1 R4_12.2 R5_12.2 | length 5.7
  Bottom Layer w0.254: Q1_12.1@29.9,68.7 32.35,68.7 R5_12.2@32.5,68.55 32.7,68.75 R4_12.2@35.5,68.75
NetQ1_13_1: Q1_13.1 R4_13.2 R5_13.2 | length 5.7
  Bottom Layer w0.254: Q1_13.1@29.9,74.2 32.35,74.2 R5_13.2@32.5,74.05 32.7,74.25 R4_13.2@35.5,74.25
NetQ1_14_1: Q1_14.1 R4_14.2 R5_14.2 | length 5.7
  Bottom Layer w0.254: Q1_14.1@29.9,79.7 32.35,79.7 R5_14.2@32.5,79.55 32.7,79.75 R4_14.2@35.5,79.75
NetQ1_15_1: Q1_15.1 R4_15.2 R5_15.2 | length 5.7
  Bottom Layer w0.254: Q1_15.1@29.9,85.2 32.35,85.2 32.5,85.05 32.7,85.25 R4_15.2@35.5,85.25
NetQ1_16_1: Q1_16.1 R4_16.2 R5_16.2 | length 5.7
  Bottom Layer w0.254: Q1_16.1@29.9,90.7 32.35,90.7 R5_16.2@32.5,90.55 32.7,90.75 R4_16.2@35.5,90.75
NetR17_2: R17.2 R67.1
NetR97_2: R97.2 T1.1
NetR98_2: R98.2 T1.2
NetR99_2: R99.2 T2.1
NetR100_2: R100.2 T2.2
NetR101_2: R101.2 T3.1
NetR102_2: R102.2 T3.2
NetR103_2: R103.2 T4.1
NetR104_2: R104.2 T4.2
NetT1_3: T1.3 T5.2
NetT1_4: T1.4 T5.1
NetT2_3: T2.3 T6.2
NetT2_4: T2.4 T6.1
NetT3_3: T3.3 T7.2
NetT3_4: T3.4 T7.1
NetT4_3: T4.3 T8.2
NetT4_4: T4.4 T8.1
NetU1_36: U1.36
NetU1_42: U1.42
NetU1_43: U1.43
NetU1_44: U1.44
NetU1_45: U1.45
NetU1_46: U1.46
NetU1_47: U1.47
NetU1_75: U1.75
NPNB: U1.71
OUT1: C44.2 U1.73
OUT2: C17.2 U1.68
RX: H1.3 U1.39
TOP: C51.2 D17.2 D18.1 H4.20 R95.1 R95.2 | length 17.1
  Top Layer w0.254: D18.1@8.25,90.5 D17.2@8.25,87.5 8.25,84.275 C51.2@8.525,84 11.425,84 R95.1@11.5,83.925 ; R95.2@11.5,81.075 12.5,80.075 H4.20@12.5,74.02
TX: H1.2 U1.38
VDIG: C63.2 C64.2 R105.2 U1.34
VIO: C46.2 C47.2 H1.5 U1.41
VM: C49.1 C50.1 U1.31
VP: C62.2 Q18.3 R105.1 U1.70
VREF: C18.2 C19.2 U1.67
VSNS0: C52.2 D1_1.1 D19.2 D20.1 H4.2 R96.1 R96.2 | length 64.3
  Top Layer w0.254: C52.2@8.85,10.5 R96.2@10.35,10.5 ; D20.1@12.25,16.5 12.25,13.75 D19.2@12,13.5 R96.1@12,10.85 ; H4.2@12.5,28.3 12.5,27.376 13.643,26.233 13.643,12.493 R96.1@12,10.85 ; D1_1.1@45,5.5 43.5,4 16,4 11.65,8.35 R96.1@11.65,10.5 R96.1@12,10.85
VSNS1: C1_1.2 D1_1.2 D1_2.1 R1_1.1 | length 13.5
  Top Layer w0.254: v1(38,6.25) 38,5.5 38.5,5 41.25,5 42.5,6.25 C1_1.2@42.5,7.25 44.25,9 D1_1.2@45,9 D1_2.1@45,11
  Bottom Layer w0.254: R1_1.1@36.65,6.25 v1(38,6.25)
VSNS2: C1_2.2 D1_2.2 D1_3.1 R1_2.1 | length 13.5
  Top Layer w0.254: v1(38,11.75) 38,11 38.5,10.5 41.25,10.5 42.5,11.75 C1_2.2@42.5,12.75 44.25,14.5 D1_2.2@45,14.5 D1_3.1@45,16.5
  Bottom Layer w0.254: R1_2.1@36.65,11.75 v1(38,11.75)
VSNS3: C1_3.2 D1_3.2 D1_4.1 R1_3.1 | length 13.5
  Top Layer w0.254: v1(38,17.25) 38,16.5 38.5,16 41.25,16 42.5,17.25 C1_3.2@42.5,18.25 44.25,20 D1_3.2@45,20 D1_4.1@45,22
  Bottom Layer w0.254: R1_3.1@36.65,17.25 v1(38,17.25)
VSNS4: C1_4.2 D1_4.2 D1_5.1 R1_4.1 | length 13.5
  Top Layer w0.254: v1(38,22.75) 38,22 38.5,21.5 41.25,21.5 42.5,22.75 C1_4.2@42.5,23.75 44.25,25.5 D1_4.2@45,25.5 D1_5.1@45,27.5
  Bottom Layer w0.254: R1_4.1@36.65,22.75 v1(38,22.75)
VSNS5: C1_5.2 D1_5.2 D1_6.1 R1_5.1 | length 13.5
  Top Layer w0.254: v1(38,28.25) 38,27.5 38.5,27 41.25,27 42.5,28.25 C1_5.2@42.5,29.25 44.25,31 D1_5.2@45,31 D1_6.1@45,33
  Bottom Layer w0.254: R1_5.1@36.65,28.25 v1(38,28.25)
VSNS6: C1_6.2 D1_6.2 D1_7.1 R1_6.1 | length 13.5
  Top Layer w0.254: v1(38,33.75) 38,33 38.5,32.5 41.25,32.5 42.5,33.75 C1_6.2@42.5,34.75 44.25,36.5 D1_6.2@45,36.5 D1_7.1@45,38.5
  Bottom Layer w0.254: R1_6.1@36.65,33.75 v1(38,33.75)
VSNS7: C1_7.2 D1_7.2 D1_8.1 R1_7.1 | length 13.5
  Top Layer w0.254: v1(38,39.25) 38,38.5 38.5,38 41.25,38 42.5,39.25 C1_7.2@42.5,40.25 44.25,42 D1_7.2@45,42 D1_8.1@45,44
  Bottom Layer w0.254: R1_7.1@36.65,39.25 v1(38,39.25)
VSNS8: C1_8.2 D1_8.2 D1_9.1 R1_8.1 | length 13.5
  Top Layer w0.254: v1(38,44.75) 38,44 38.5,43.5 41.25,43.5 42.5,44.75 C1_8.2@42.5,45.75 44.25,47.5 D1_8.2@45,47.5 D1_9.1@45,49.5
  Bottom Layer w0.254: R1_8.1@36.65,44.75 v1(38,44.75)
VSNS9: C1_9.2 D1_9.2 D1_10.1 R1_9.1 | length 13.5
  Top Layer w0.254: v1(38,50.25) 38,49.5 38.5,49 41.25,49 42.5,50.25 C1_9.2@42.5,51.25 44.25,53 D1_9.2@45,53 D1_10.1@45,55
  Bottom Layer w0.254: R1_9.1@36.65,50.25 v1(38,50.25)
VSNS10: C1_10.2 D1_10.2 D1_11.1 R1_10.1 | length 13.5
  Top Layer w0.254: v1(38,55.75) 38,55 38.5,54.5 41.25,54.5 42.5,55.75 C1_10.2@42.5,56.75 44.25,58.5 D1_10.2@45,58.5 D1_11.1@45,60.5
  Bottom Layer w0.254: R1_10.1@36.65,55.75 v1(38,55.75)
VSNS11: C1_11.2 D1_11.2 D1_12.1 R1_11.1 | length 13.5
  Top Layer w0.254: v1(38,61.25) 38,60.5 38.5,60 41.25,60 42.5,61.25 C1_11.2@42.5,62.25 44.25,64 D1_11.2@45,64 D1_12.1@45,66
  Bottom Layer w0.254: R1_11.1@36.65,61.25 v1(38,61.25)
VSNS12: C1_12.2 D1_12.2 D1_13.1 R1_12.1 | length 13.5
  Top Layer w0.254: v1(38,66.75) 38,66 38.5,65.5 41.25,65.5 42.5,66.75 C1_12.2@42.5,67.75 44.25,69.5 D1_12.2@45,69.5 ; D1_12.2@45,69.5 D1_13.1@45,71.5
  Bottom Layer w0.254: R1_12.1@36.65,66.75 v1(38,66.75)
VSNS13: C1_13.2 D1_13.2 D1_14.1 R1_13.1 | length 13.5
  Top Layer w0.254: v1(38,72.25) 38,71.5 38.5,71 41.25,71 42.5,72.25 C1_13.2@42.5,73.25 44.25,75 D1_13.2@45,75 D1_14.1@45,77
  Bottom Layer w0.254: R1_13.1@36.65,72.25 v1(38,72.25)
VSNS14: C1_14.2 D1_14.2 D1_15.1 R1_14.1 | length 13.5
  Top Layer w0.254: v1(38,77.75) 38,77 38.5,76.5 41.25,76.5 42.5,77.75 C1_14.2@42.5,78.75 44.25,80.5 D1_14.2@45,80.5 D1_15.1@45,82.5
  Bottom Layer w0.254: R1_14.1@36.65,77.75 v1(38,77.75)
VSNS15: C1_15.2 D1_15.2 D1_16.1 R1_15.1 | length 13.4
  Top Layer w0.254: v1(38,83.25) 38,82.75 38.75,82 41.25,82 42.5,83.25 C1_15.2@42.5,84.25 44.25,86 D1_15.2@45,86 D1_16.1@45,88
  Bottom Layer w0.254: R1_15.1@36.65,83.25 v1(38,83.25)
VSNS16: C1_16.2 D1_16.2 D17.1 D18.2 R1_16.1 | length 49.9
  Top Layer w0.254: D17.1@11.75,87.5 D18.2@11.75,90.5 12,90.5 15,93.5 43,93.5 D1_16.2@45,91.5 44.25,91.5 C1_16.2@42.5,89.75 42.5,88.75 41.25,87.5 38.5,87.5 38,88 v1(38,88.75)
  Bottom Layer w0.254: R1_16.1@36.65,88.75 v1(38,88.75)
WAKEUP: H1.6 U1.49
pads on no net: C17.1 C18.1 C19.1 C44.1 C45.2 C46.1 C47.1 C49.2 C50.2 C61.1 Q18.1 Q18.4 R17.1 R67.2 U1.1 U1.2 U1.3 U1.4 U1.5 U1.6 U1.7 U1.8 U1.9 U1.10 U1.11 U1.12 U1.13 U1.14 U1.15 U1.16 U1.17 U1.18 U1.19 U1.20 U1.21 U1.22 U1.23 U1.24 U1.25 U1.26 U1.27 U1.28 U1.29 U1.30 U1.35 U1.37 U1.48 U1.59 U1.62 U1.63 U1.64 U1.65 U1.69 U1.72 U1.74 U1.76 U1.77 U1.78 U1.79 U1.80
copper on no net: | length 306
  Top Layer w0.254: 0,0 0,100 100,100 100,-1
  Bottom Layer w0.254: 50,97.5 50,102.5